# EAGLE board business-card-2 (EAGLE 9.4.2)
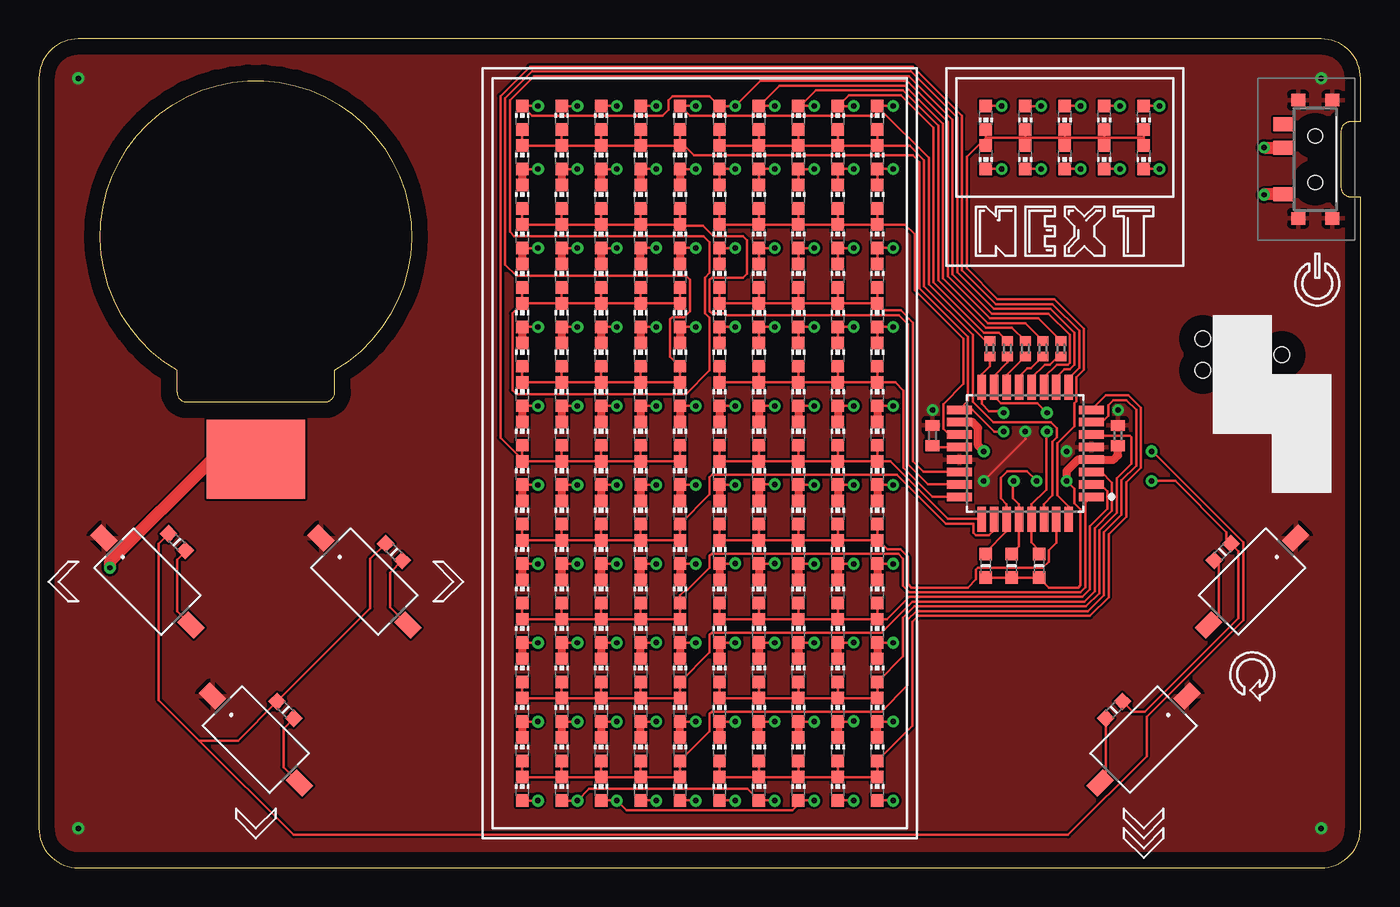
[diagram p0: board, top side]
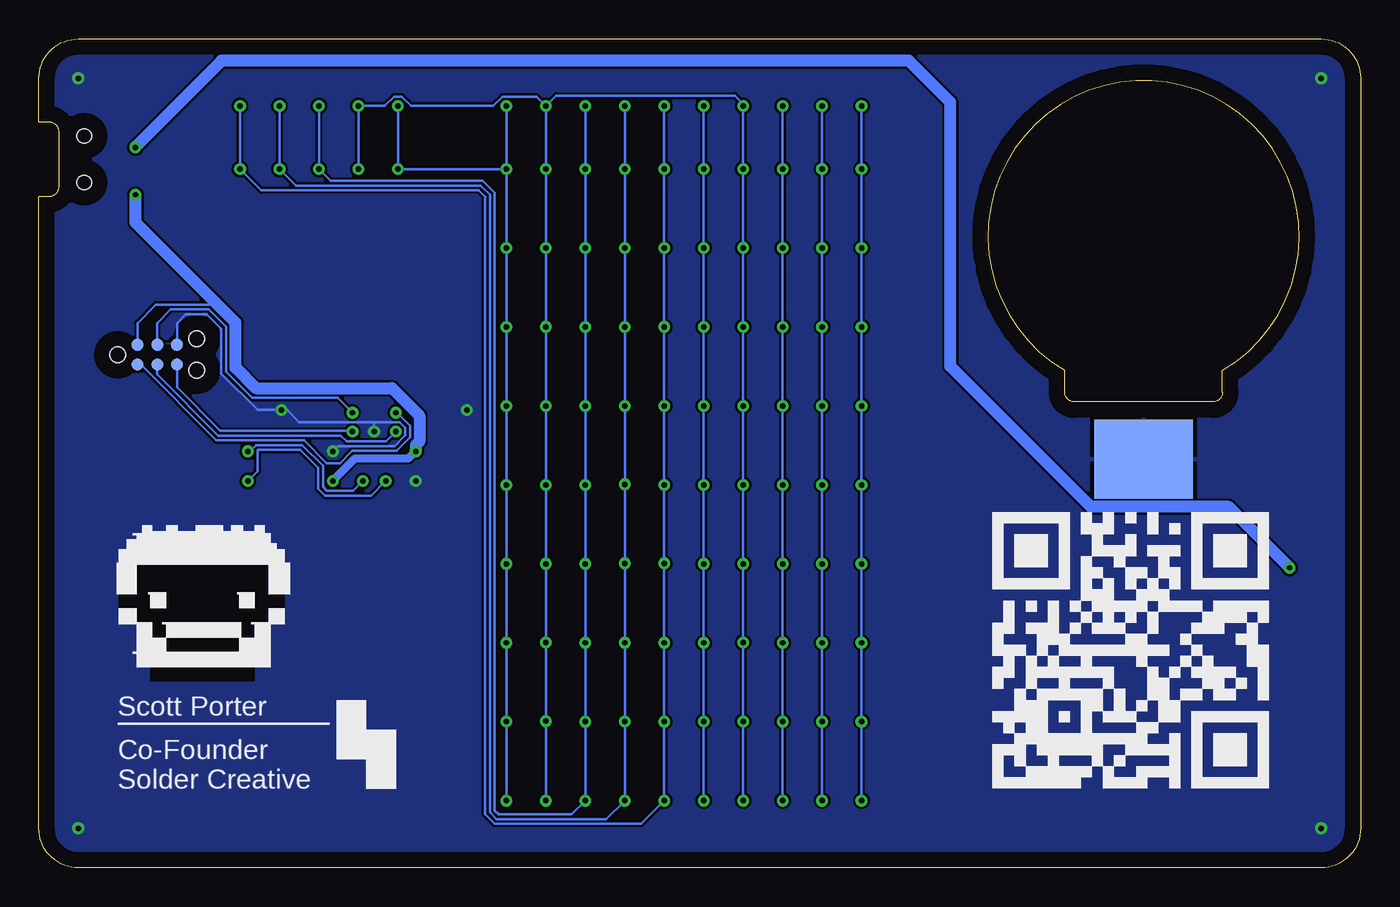
[diagram p1: board, bottom side, seen from below]

Size 85.09 x 53.34 mm. Coordinates in mm from the lower left corner, seen from the top.
Outline: 0,50.8 0,2.54 arc90 2.54,0 82.55,0 arc90 85.09,2.54 85.09,43.18 84.45,43.18 arc-90 83.82,43.81 83.82,47.37 arc-90 84.45,48.01 85.09,48.01 85.09,50.8 arc90 82.55,53.34 2.54,53.34 arc90 0,50.8
Copper layers (1*16): Top 0.035mm / dielectric 1.5mm / Bottom 0.035mm
Design rules "default": minimum track width 6mil, minimum drill 0.35mm, track to track 6mil, track to pad 6mil, pad to pad 6mil, via to via 6mil, smd to smd 6mil, copper to edge 40mil, drill to drill 6mil, minimum pad ring 10mil, minimum via ring 8mil, stop-mask expansion 4mil, vias tented up to drill 0mil, thermal gap 10mil
bRestrict: area 71.2,12 to 77.9,12.1; area 71.2,12.1 to 77.9,12.3; area 71.2,12.3 to 77.9,12.4; area 71.2,12.4 to 77.9,12.5; area 71.2,12.5 to 77.9,12.6; area 71.2,12.6 to 77.9,12.8; area 71.2,12.8 to 77.9,12.9; area 72.2,13.9 to 76.9,14; area 72.2,14 to 76.9,14.2; area 72.2,14.2 to 76.9,14.3; area 72.2,14.3 to 76.9,14.4; area 72.2,14.4 to 76.9,14.5; 63 more areas

## Footprints (pad centres in the part's own frame; a part is rotated, then mirrored left to right if it is on the bottom)
C0402 = smd 0.7 x 0.9: 1 -0.65,0; 2 0.65,0
K21107STA4SW06 = smd 1.5 x 1: 1 -3.95,0; 2 3.95,0
R0402 = smd 0.6 x 0.7: 1 -0.5,0; 2 0.5,0
52101-101-REV-A_RC-MASTER-SMD_R0603MP = smd 0.8 x 0.8: 1 -0.762,0; 2 0.762,0
K31296SE1 = smd 0.9 x 1.25: 1 -2.25,-2.075; 2 -0.75,-2.075; 3 2.25,-2.075 | smd 0.8 x 0.9: MP1 -3.8,1.1; MP2 -3.8,-1.1; MP3 3.8,-1.1; MP4 3.8,1.1 | hole 0.9: -1.5,0; 1.5,0
CHIP-LED0603 = smd 0.8 x 0.8: A 0,-0.75; C 0,0.75
TC2030-IDC-NL = smd 0.787 x 0.787: 1 -1.27,-0.635; 2 -1.27,0.635; 3 0,-0.635; 4 0,0.635; 5 1.27,-0.635; 6 1.27,0.635 | hole 0.991: -2.54,0; 2.54,1.016; 2.54,-1.016
MICROCHIP_ATMEGA328PB-AU_0 = smd 1.6 x 0.55: 1 -4.25,2.8; 2 -4.25,2; 3 -4.25,1.2; 4 -4.25,0.4; 5 -4.25,-0.4; 6 -4.25,-1.2; 7 -4.25,-2; 8 -4.25,-2.8; 17 4.25,-2.8; 18 4.25,-2; 19 4.25,-1.2; 20 4.25,-0.4; 21 4.25,0.4; 22 4.25,1.2; 23 4.25,2; 24 4.25,2.8 | smd 0.55 x 1.6: 9 -2.8,-4.25; 10 -2,-4.25; 11 -1.2,-4.25; 12 -0.4,-4.25; 13 0.4,-4.25; 14 1.2,-4.25; 15 2,-4.25; 16 2.8,-4.25; 25 2.8,4.25; 26 2,4.25; 27 1.2,4.25; 28 0.4,4.25; 29 -0.4,4.25; 30 -1.2,4.25; 31 -2,4.25; 32 -2.8,4.25
THROUGH-HOLE-CR2032 = smd 6.35 x 5.08: P$1 0,-14.351 | smd 6.35 x 5.08 bottom: P$2 0,-14.351

## Placement (x,y rotation side)
C1  10uf  [C0402]  69.47,27.81 270 top
C2  0.1uF  [C0402]  57.53,27.81 90 top
DOWN  K2-1107ST-A4SW-06  [K21107STA4SW06]  13.97,8.26 315 top
FAST_DROP  K2-1107ST-A4SW-06  [K21107STA4SW06]  71.12,8.26 225 top
LEFT  K2-1107ST-A4SW-06  [K21107STA4SW06]  6.99,18.41 315 top
R1  470R  [R0402]  64.64,33.4 270 top
R2  470R  [R0402]  63.5,33.4 270 top
R3  470R  [R0402]  62.36,33.4 270 top
R5  10K  [52101-101-REV-A_RC-MASTER-SMD_R0603MP]  15.88,10.16 135 top
R6  4K7  [52101-101-REV-A_RC-MASTER-SMD_R0603MP]  8.89,20.95 135 top
R7  1K  [52101-101-REV-A_RC-MASTER-SMD_R0603MP]  22.86,20.32 135 top
R8  470R  [R0402]  65.79,33.4 270 top
R9  10K  [52101-101-REV-A_RC-MASTER-SMD_R0603MP]  64.39,19.43 270 top
R10  10K  [52101-101-REV-A_RC-MASTER-SMD_R0603MP]  60.96,19.43 270 top
R11  1K  [52101-101-REV-A_RC-MASTER-SMD_R0603MP]  69.22,10.16 45 top
R12  10K  [52101-101-REV-A_RC-MASTER-SMD_R0603MP]  76.2,20.32 45 top
R14  10K  [52101-101-REV-A_RC-MASTER-SMD_R0603MP]  62.61,19.43 270 top
R15  470R  [R0402]  61.21,33.4 270 top
RIGHT  K2-1107ST-A4SW-06  [K21107STA4SW06]  20.95,18.41 315 top
S1  K3-1296S-E1  [K31296SE1]  82.17,45.59 270 top
S_LED1  20mA  [CHIP-LED0603]  31.11,5.08 0 top
S_LED2  20mA  [CHIP-LED0603]  33.66,5.08 0 top
S_LED3  20mA  [CHIP-LED0603]  36.2,5.08 0 top
S_LED4  20mA  [CHIP-LED0603]  38.73,5.08 0 top
S_LED5  20mA  [CHIP-LED0603]  41.27,5.08 0 top
S_LED6  20mA  [CHIP-LED0603]  31.11,7.62 0 top
S_LED7  20mA  [CHIP-LED0603]  33.66,7.62 0 top
S_LED8  20mA  [CHIP-LED0603]  36.2,7.62 0 top
S_LED9  20mA  [CHIP-LED0603]  38.73,7.62 0 top
S_LED10  20mA  [CHIP-LED0603]  41.27,7.62 0 top
S_LED11  20mA  [CHIP-LED0603]  31.11,10.16 0 top
S_LED12  20mA  [CHIP-LED0603]  33.66,10.16 0 top
S_LED13  20mA  [CHIP-LED0603]  36.2,10.16 0 top
S_LED14  20mA  [CHIP-LED0603]  38.73,10.16 0 top
S_LED15  20mA  [CHIP-LED0603]  41.27,10.16 0 top
S_LED16  20mA  [CHIP-LED0603]  31.11,12.7 0 top
S_LED17  20mA  [CHIP-LED0603]  33.66,12.7 0 top
S_LED18  20mA  [CHIP-LED0603]  36.2,12.7 0 top
S_LED19  20mA  [CHIP-LED0603]  38.73,12.7 0 top
S_LED20  20mA  [CHIP-LED0603]  41.27,12.7 0 top
S_LED21  20mA  [CHIP-LED0603]  31.11,15.24 0 top
S_LED22  20mA  [CHIP-LED0603]  33.66,15.24 0 top
S_LED23  20mA  [CHIP-LED0603]  36.2,15.24 0 top
S_LED24  20mA  [CHIP-LED0603]  38.73,15.24 0 top
S_LED25  20mA  [CHIP-LED0603]  41.27,15.24 0 top
S_LED26  20mA  [CHIP-LED0603]  31.11,17.78 0 top
S_LED27  20mA  [CHIP-LED0603]  33.66,17.78 0 top
S_LED28  20mA  [CHIP-LED0603]  36.2,17.78 0 top
S_LED29  20mA  [CHIP-LED0603]  38.73,17.78 0 top
S_LED30  20mA  [CHIP-LED0603]  41.27,17.78 0 top
S_LED31  20mA  [CHIP-LED0603]  31.11,20.32 0 top
S_LED32  20mA  [CHIP-LED0603]  33.66,20.32 0 top
S_LED33  20mA  [CHIP-LED0603]  36.2,20.32 0 top
S_LED34  20mA  [CHIP-LED0603]  38.73,20.32 0 top
S_LED35  20mA  [CHIP-LED0603]  41.27,20.32 0 top
S_LED36  20mA  [CHIP-LED0603]  31.11,22.86 0 top
S_LED37  20mA  [CHIP-LED0603]  33.66,22.86 0 top
S_LED38  20mA  [CHIP-LED0603]  36.2,22.86 0 top
S_LED39  20mA  [CHIP-LED0603]  38.73,22.86 0 top
S_LED40  20mA  [CHIP-LED0603]  41.27,22.86 0 top
S_LED41  20mA  [CHIP-LED0603]  31.11,25.4 0 top
S_LED42  20mA  [CHIP-LED0603]  33.66,25.4 0 top
S_LED43  20mA  [CHIP-LED0603]  36.2,25.4 0 top
S_LED44  20mA  [CHIP-LED0603]  38.73,25.4 0 top
S_LED45  20mA  [CHIP-LED0603]  41.27,25.4 0 top
S_LED46  20mA  [CHIP-LED0603]  31.11,27.94 0 top
S_LED47  20mA  [CHIP-LED0603]  33.66,27.94 0 top
S_LED48  20mA  [CHIP-LED0603]  36.2,27.94 0 top
S_LED49  20mA  [CHIP-LED0603]  38.73,27.94 0 top
S_LED50  20mA  [CHIP-LED0603]  41.27,27.94 0 top
S_LED51  20mA  [CHIP-LED0603]  31.11,30.48 0 top
S_LED52  20mA  [CHIP-LED0603]  33.66,30.48 0 top
S_LED53  20mA  [CHIP-LED0603]  36.2,30.48 0 top
S_LED54  20mA  [CHIP-LED0603]  38.73,30.48 0 top
S_LED55  20mA  [CHIP-LED0603]  41.27,30.48 0 top
S_LED56  20mA  [CHIP-LED0603]  31.11,33.02 0 top
S_LED57  20mA  [CHIP-LED0603]  33.66,33.02 0 top
S_LED58  20mA  [CHIP-LED0603]  36.2,33.02 0 top
S_LED59  20mA  [CHIP-LED0603]  38.73,33.02 0 top
S_LED60  20mA  [CHIP-LED0603]  41.27,33.02 0 top
S_LED61  20mA  [CHIP-LED0603]  31.11,35.56 0 top
S_LED62  20mA  [CHIP-LED0603]  33.66,35.56 0 top
S_LED63  20mA  [CHIP-LED0603]  36.2,35.56 0 top
S_LED64  20mA  [CHIP-LED0603]  38.73,35.56 0 top
S_LED65  20mA  [CHIP-LED0603]  41.27,35.56 0 top
S_LED66  20mA  [CHIP-LED0603]  31.11,38.1 0 top
S_LED67  20mA  [CHIP-LED0603]  33.66,38.1 0 top
S_LED68  20mA  [CHIP-LED0603]  36.2,38.1 0 top
S_LED69  20mA  [CHIP-LED0603]  38.73,38.1 0 top
S_LED70  20mA  [CHIP-LED0603]  41.27,38.1 0 top
S_LED71  20mA  [CHIP-LED0603]  31.11,40.64 0 top
S_LED72  20mA  [CHIP-LED0603]  33.66,40.64 0 top
S_LED73  20mA  [CHIP-LED0603]  36.2,40.64 0 top
S_LED74  20mA  [CHIP-LED0603]  38.73,40.64 0 top
S_LED75  20mA  [CHIP-LED0603]  41.27,40.64 0 top
S_LED76  20mA  [CHIP-LED0603]  31.11,43.18 0 top
S_LED77  20mA  [CHIP-LED0603]  33.66,43.18 0 top
S_LED78  20mA  [CHIP-LED0603]  36.2,43.18 0 top
S_LED79  20mA  [CHIP-LED0603]  38.73,43.18 0 top
S_LED80  20mA  [CHIP-LED0603]  41.27,43.18 0 top
S_LED81  20mA  [CHIP-LED0603]  31.11,45.72 0 top
S_LED82  20mA  [CHIP-LED0603]  33.66,45.72 0 top
S_LED83  20mA  [CHIP-LED0603]  36.2,45.72 0 top
S_LED84  20mA  [CHIP-LED0603]  38.73,45.72 0 top
S_LED85  20mA  [CHIP-LED0603]  41.27,45.72 0 top
S_LED86  20mA  [CHIP-LED0603]  31.11,48.26 0 top
S_LED87  20mA  [CHIP-LED0603]  33.66,48.26 0 top
S_LED88  20mA  [CHIP-LED0603]  36.2,48.26 0 top
S_LED89  20mA  [CHIP-LED0603]  38.73,48.26 0 top
S_LED90  20mA  [CHIP-LED0603]  41.27,48.26 0 top
S_LED91  20mA  [CHIP-LED0603]  43.81,5.08 0 top
S_LED92  20mA  [CHIP-LED0603]  46.35,5.08 0 top
S_LED93  20mA  [CHIP-LED0603]  48.9,5.08 0 top
S_LED94  20mA  [CHIP-LED0603]  51.44,5.08 0 top
S_LED95  20mA  [CHIP-LED0603]  53.98,5.08 0 top
S_LED96  20mA  [CHIP-LED0603]  43.81,7.62 0 top
S_LED97  20mA  [CHIP-LED0603]  46.35,7.62 0 top
S_LED98  20mA  [CHIP-LED0603]  48.9,7.62 0 top
S_LED99  20mA  [CHIP-LED0603]  51.44,7.62 0 top
S_LED100  20mA  [CHIP-LED0603]  53.98,7.62 0 top
S_LED101  20mA  [CHIP-LED0603]  43.81,10.16 0 top
S_LED102  20mA  [CHIP-LED0603]  46.35,10.16 0 top
S_LED103  20mA  [CHIP-LED0603]  48.9,10.16 0 top
S_LED104  20mA  [CHIP-LED0603]  51.44,10.16 0 top
S_LED105  20mA  [CHIP-LED0603]  53.98,10.16 0 top
S_LED106  20mA  [CHIP-LED0603]  43.81,12.7 0 top
S_LED107  20mA  [CHIP-LED0603]  46.35,12.7 0 top
S_LED108  20mA  [CHIP-LED0603]  48.9,12.7 0 top
S_LED109  20mA  [CHIP-LED0603]  51.44,12.7 0 top
S_LED110  20mA  [CHIP-LED0603]  53.98,12.7 0 top
S_LED111  20mA  [CHIP-LED0603]  43.81,15.24 0 top
S_LED112  20mA  [CHIP-LED0603]  46.35,15.24 0 top
S_LED113  20mA  [CHIP-LED0603]  48.9,15.24 0 top
S_LED114  20mA  [CHIP-LED0603]  51.44,15.24 0 top
S_LED115  20mA  [CHIP-LED0603]  53.98,15.24 0 top
S_LED116  20mA  [CHIP-LED0603]  43.81,17.78 0 top
S_LED117  20mA  [CHIP-LED0603]  46.35,17.78 0 top
S_LED118  20mA  [CHIP-LED0603]  48.9,17.78 0 top
S_LED119  20mA  [CHIP-LED0603]  51.44,17.78 0 top
S_LED120  20mA  [CHIP-LED0603]  53.98,17.78 0 top
S_LED121  20mA  [CHIP-LED0603]  43.81,20.32 0 top
S_LED122  20mA  [CHIP-LED0603]  46.35,20.32 0 top
S_LED123  20mA  [CHIP-LED0603]  48.9,20.32 0 top
S_LED124  20mA  [CHIP-LED0603]  51.44,20.32 0 top
S_LED125  20mA  [CHIP-LED0603]  53.98,20.32 0 top
S_LED126  20mA  [CHIP-LED0603]  43.81,22.86 0 top
S_LED127  20mA  [CHIP-LED0603]  46.35,22.86 0 top
S_LED128  20mA  [CHIP-LED0603]  48.9,22.86 0 top
S_LED129  20mA  [CHIP-LED0603]  51.44,22.86 0 top
S_LED130  20mA  [CHIP-LED0603]  53.98,22.86 0 top
S_LED131  20mA  [CHIP-LED0603]  43.81,25.4 0 top
S_LED132  20mA  [CHIP-LED0603]  46.35,25.4 0 top
S_LED133  20mA  [CHIP-LED0603]  48.9,25.4 0 top
S_LED134  20mA  [CHIP-LED0603]  51.44,25.4 0 top
S_LED135  20mA  [CHIP-LED0603]  53.98,25.4 0 top
S_LED136  20mA  [CHIP-LED0603]  43.81,27.94 0 top
S_LED137  20mA  [CHIP-LED0603]  46.35,27.94 0 top
S_LED138  20mA  [CHIP-LED0603]  48.9,27.94 0 top
S_LED139  20mA  [CHIP-LED0603]  51.44,27.94 0 top
S_LED140  20mA  [CHIP-LED0603]  53.98,27.94 0 top
S_LED141  20mA  [CHIP-LED0603]  43.81,30.48 0 top
S_LED142  20mA  [CHIP-LED0603]  46.35,30.48 0 top
S_LED143  20mA  [CHIP-LED0603]  48.9,30.48 0 top
S_LED144  20mA  [CHIP-LED0603]  51.44,30.48 0 top
S_LED145  20mA  [CHIP-LED0603]  53.98,30.48 0 top
S_LED146  20mA  [CHIP-LED0603]  43.81,33.02 0 top
S_LED147  20mA  [CHIP-LED0603]  46.35,33.02 0 top
S_LED148  20mA  [CHIP-LED0603]  48.9,33.02 0 top
S_LED149  20mA  [CHIP-LED0603]  51.44,33.02 0 top
S_LED150  20mA  [CHIP-LED0603]  53.98,33.02 0 top
S_LED151  20mA  [CHIP-LED0603]  43.81,35.56 0 top
S_LED152  20mA  [CHIP-LED0603]  46.35,35.56 0 top
S_LED153  20mA  [CHIP-LED0603]  48.9,35.56 0 top
S_LED154  20mA  [CHIP-LED0603]  51.44,35.56 0 top
S_LED155  20mA  [CHIP-LED0603]  53.98,35.56 0 top
S_LED156  20mA  [CHIP-LED0603]  43.81,38.1 0 top
S_LED157  20mA  [CHIP-LED0603]  46.35,38.1 0 top
S_LED158  20mA  [CHIP-LED0603]  48.9,38.1 0 top
S_LED159  20mA  [CHIP-LED0603]  51.44,38.1 0 top
S_LED160  20mA  [CHIP-LED0603]  53.98,38.1 0 top
S_LED161  20mA  [CHIP-LED0603]  43.81,40.64 0 top
S_LED162  20mA  [CHIP-LED0603]  46.35,40.64 0 top
S_LED163  20mA  [CHIP-LED0603]  48.9,40.64 0 top
S_LED164  20mA  [CHIP-LED0603]  51.44,40.64 0 top
S_LED165  20mA  [CHIP-LED0603]  53.98,40.64 0 top
S_LED166  20mA  [CHIP-LED0603]  43.81,43.18 0 top
S_LED167  20mA  [CHIP-LED0603]  46.35,43.18 0 top
S_LED168  20mA  [CHIP-LED0603]  48.9,43.18 0 top
S_LED169  20mA  [CHIP-LED0603]  51.44,43.18 0 top
S_LED170  20mA  [CHIP-LED0603]  53.98,43.18 0 top
S_LED171  20mA  [CHIP-LED0603]  43.81,45.72 0 top
S_LED172  20mA  [CHIP-LED0603]  46.35,45.72 0 top
S_LED173  20mA  [CHIP-LED0603]  48.9,45.72 0 top
S_LED174  20mA  [CHIP-LED0603]  51.44,45.72 0 top
S_LED175  20mA  [CHIP-LED0603]  53.98,45.72 0 top
S_LED176  20mA  [CHIP-LED0603]  43.81,48.26 0 top
S_LED177  20mA  [CHIP-LED0603]  46.35,48.26 0 top
S_LED178  20mA  [CHIP-LED0603]  48.9,48.26 0 top
S_LED179  20mA  [CHIP-LED0603]  51.44,48.26 0 top
S_LED180  20mA  [CHIP-LED0603]  53.98,48.26 0 top
S_LED181  20mA  [CHIP-LED0603]  71.12,48.26 180 top
S_LED182  20mA  [CHIP-LED0603]  68.58,48.26 180 top
S_LED183  20mA  [CHIP-LED0603]  66.04,48.26 180 top
S_LED184  20mA  [CHIP-LED0603]  63.5,48.26 180 top
S_LED185  20mA  [CHIP-LED0603]  60.96,48.26 180 top
S_LED186  20mA  [CHIP-LED0603]  71.12,45.72 180 top
S_LED187  20mA  [CHIP-LED0603]  68.58,45.72 180 top
S_LED188  20mA  [CHIP-LED0603]  66.04,45.72 180 top
S_LED189  20mA  [CHIP-LED0603]  63.5,45.72 180 top
S_LED190  20mA  [CHIP-LED0603]  60.96,45.72 180 top
SPIN  K2-1107ST-A4SW-06  [K21107STA4SW06]  78.11,18.41 225 top
TC1  TC2030-IDC-NL  [TC2030-IDC-NL]  77.47,33.02 0 bottom
U1  MICROCHIP_ATMEGA328PB-AUMICROCHIP_ATMEGA328PB-AU_0_0  [MICROCHIP_ATMEGA328PB-AU_0]  63.5,26.67 180 top
U$1  THROUGHHOLE-CR2032  [THROUGH-HOLE-CR2032]  13.97,40.64 0 top

## Library data of the parts
C1 C2 = rcl; SPICEPREFIX: C
DOWN FAST_DROP LEFT RIGHT SPIN = K2-1107ST-A4SW-06; DESCRIPTION: Tactile Switches SPST-NO 6.10mm x 3.60mm 2.50mm 50mA @ 12VDC SMD RoHS; HEIGHT: 2.5mm; MANUFACTURER_NAME: Korean Hroparts Elec; MANUFACTURER_PART_NUMBER: K2-1107ST-A4SW-06
R1-R3 R8 R15 = rcl; SPICEPREFIX: R
R5-R7 R9-R12 R14 = ESP32_DMX_Audio
S1 = K3-1296S-E1; DESCRIPTION: Toggle Switches SMD RoHS; HEIGHT: 1.6mm; MANUFACTURER_NAME: Korean Hroparts Elec; MANUFACTURER_PART_NUMBER: K3-1296S-E1
S_LED1-S_LED190 = led
TC1 = TC2030-IDC; AVAILABILITY: Warning; DESCRIPTION: Plug-Of-Nails™ Adapter Cable; MF: Tag-Connect LLC; MP: TC2030-IDC; PACKAGE: None; PRICE: None; PURCHASE-URL: https://pricing.snapeda.com/search/part/TC2030-IDC/?ref=eda
U1 = Microchip - ATmega328PB-AU; CENTROID_NOT_SPECIFIED: No; DATASHEET: http://ww1.microchip.com/downloads/en/DeviceDoc/40001907A.pdf; DIGIKEY_DESCRIPTION: IC MCU 8BIT 32KB FLASH 32TQFP; DIGIKEY_PART_NUMBER: ATMEGA328PB-AU-ND; LEAD_FREE: yes; MF: Microchip; MFG_PACKAGE_IDENT: 32A; MOUSER_PART_NUMBER: 556-ATMEGA328PB-AU; MPN: ATmega328PB-AU; PACKAGE: TQFP32; PREFIX: U; ROHS: yes; TEMPERATURE_RANGE_HIGH: +85°C; TEMPERATURE_RANGE_LOW: -40°C; VOLTAGE: 5.5V
U$1 = through-hole-cr2032

## Nets
AREF: C2.1 U1.20
BUT_DIR: R5.2 R6.2 R7.2 R10.1 U1.27
BUT_DOWN: DOWN.2 R5.1
BUT_LEFT: LEFT.2 R6.1
BUT_RIGHT: R7.1 RIGHT.2
BUT_SPIN: R11.2 R12.2 R14.1 U1.28
BUT_SPIN_LEFT: FAST_DROP.2 R11.1
BUT_SPIN_RIGHT: R12.1 SPIN.2
C0: S_LED1.C S_LED2.C S_LED3.C S_LED4.C S_LED5.C S_LED6.A S_LED7.A S_LED8.A S_LED9.A S_LED10.A U1.7
C1: S_LED11.C S_LED12.C S_LED13.C S_LED14.C S_LED15.C S_LED16.A S_LED17.A S_LED18.A S_LED19.A S_LED20.A U1.3
C2: S_LED21.C S_LED22.C S_LED23.C S_LED24.C S_LED25.C S_LED26.A S_LED27.A S_LED28.A S_LED29.A S_LED30.A U1.1
C3: S_LED31.C S_LED32.C S_LED33.C S_LED34.C S_LED35.C S_LED36.A S_LED37.A S_LED38.A S_LED39.A S_LED40.A U1.26
C4: S_LED41.C S_LED42.C S_LED43.C S_LED44.C S_LED45.C S_LED46.A S_LED47.A S_LED48.A S_LED49.A S_LED50.A U1.9
C5: S_LED51.C S_LED52.C S_LED53.C S_LED54.C S_LED55.C S_LED56.A S_LED57.A S_LED58.A S_LED59.A S_LED60.A U1.10
C6: S_LED61.C S_LED62.C S_LED63.C S_LED64.C S_LED65.C S_LED66.A S_LED67.A S_LED68.A S_LED69.A S_LED70.A U1.11
C7: S_LED71.C S_LED72.C S_LED73.C S_LED74.C S_LED75.C S_LED76.A S_LED77.A S_LED78.A S_LED79.A S_LED80.A U1.23
C8: S_LED81.C S_LED82.C S_LED83.C S_LED84.C S_LED85.C S_LED86.A S_LED87.A S_LED88.A S_LED89.A S_LED90.A TC1.3 U1.17
C9: S_LED91.C S_LED92.C S_LED93.C S_LED94.C S_LED95.C S_LED96.A S_LED97.A S_LED98.A S_LED99.A S_LED100.A U1.8
C10: S_LED101.C S_LED102.C S_LED103.C S_LED104.C S_LED105.C S_LED106.A S_LED107.A S_LED108.A S_LED109.A S_LED110.A U1.6
C11: S_LED111.C S_LED112.C S_LED113.C S_LED114.C S_LED115.C S_LED116.A S_LED117.A S_LED118.A S_LED119.A S_LED120.A U1.2
C12: S_LED121.C S_LED122.C S_LED123.C S_LED124.C S_LED125.C S_LED126.A S_LED127.A S_LED128.A S_LED129.A S_LED130.A U1.31
C13: S_LED131.C S_LED132.C S_LED133.C S_LED134.C S_LED135.C S_LED136.A S_LED137.A S_LED138.A S_LED139.A S_LED140.A U1.25
C14: S_LED141.C S_LED142.C S_LED143.C S_LED144.C S_LED145.C S_LED146.A S_LED147.A S_LED148.A S_LED149.A S_LED150.A U1.24
C15: S_LED151.C S_LED152.C S_LED153.C S_LED154.C S_LED155.C S_LED156.A S_LED157.A S_LED158.A S_LED159.A S_LED160.A U1.22
C16: S_LED161.C S_LED162.C S_LED163.C S_LED164.C S_LED165.C S_LED166.A S_LED167.A S_LED168.A S_LED169.A S_LED170.A U1.19
C17: S_LED171.C S_LED172.C S_LED173.C S_LED174.C S_LED175.C S_LED176.A S_LED177.A S_LED178.A S_LED179.A S_LED180.A U1.30
C18: S_LED181.C S_LED182.C S_LED183.C S_LED184.C S_LED185.C S_LED186.A S_LED187.A S_LED188.A S_LED189.A S_LED190.A U1.32
GND: C1.1 C2.2 DOWN.1 FAST_DROP.1 LEFT.1 RIGHT.1 S1.MP1 S1.MP2 S1.MP3 S1.MP4 SPIN.1 TC1.6 U1.5 U1.21 U$1.P$2
MISO: R15.2 TC1.1 U1.16
MOSI: R3.2 TC1.4 U1.15
N$2: R2.2 U1.14
N$21: R8.2 U1.12
N$22: R1.2 U1.13
R0: R8.1 S_LED1.A S_LED6.C S_LED11.A S_LED16.C S_LED21.A S_LED26.C S_LED31.A S_LED36.C S_LED41.A S_LED46.C S_LED51.A S_LED56.C S_LED61.A S_LED66.C S_LED71.A S_LED76.C S_LED81.A S_LED86.C S_LED91.A S_LED96.C S_LED101.A S_LED106.C S_LED111.A S_LED116.C S_LED121.A S_LED126.C S_LED131.A S_LED136.C S_LED141.A S_LED146.C S_LED151.A S_LED156.C S_LED161.A S_LED166.C S_LED171.A S_LED176.C S_LED181.A S_LED186.C
R1: R1.1 S_LED2.A S_LED7.C S_LED12.A S_LED17.C S_LED22.A S_LED27.C S_LED32.A S_LED37.C S_LED42.A S_LED47.C S_LED52.A S_LED57.C S_LED62.A S_LED67.C S_LED72.A S_LED77.C S_LED82.A S_LED87.C S_LED92.A S_LED97.C S_LED102.A S_LED107.C S_LED112.A S_LED117.C S_LED122.A S_LED127.C S_LED132.A S_LED137.C S_LED142.A S_LED147.C S_LED152.A S_LED157.C S_LED162.A S_LED167.C S_LED172.A S_LED177.C S_LED182.A S_LED187.C
R2: R2.1 S_LED3.A S_LED8.C S_LED13.A S_LED18.C S_LED23.A S_LED28.C S_LED33.A S_LED38.C S_LED43.A S_LED48.C S_LED53.A S_LED58.C S_LED63.A S_LED68.C S_LED73.A S_LED78.C S_LED83.A S_LED88.C S_LED93.A S_LED98.C S_LED103.A S_LED108.C S_LED113.A S_LED118.C S_LED123.A S_LED128.C S_LED133.A S_LED138.C S_LED143.A S_LED148.C S_LED153.A S_LED158.C S_LED163.A S_LED168.C S_LED173.A S_LED178.C S_LED183.A S_LED188.C
R3: R3.1 S_LED4.A S_LED9.C S_LED14.A S_LED19.C S_LED24.A S_LED29.C S_LED34.A S_LED39.C S_LED44.A S_LED49.C S_LED54.A S_LED59.C S_LED64.A S_LED69.C S_LED74.A S_LED79.C S_LED84.A S_LED89.C S_LED94.A S_LED99.C S_LED104.A S_LED109.C S_LED114.A S_LED119.C S_LED124.A S_LED129.C S_LED134.A S_LED139.C S_LED144.A S_LED149.C S_LED154.A S_LED159.C S_LED164.A S_LED169.C S_LED174.A S_LED179.C S_LED184.A S_LED189.C
R4: R15.1 S_LED5.A S_LED10.C S_LED15.A S_LED20.C S_LED25.A S_LED30.C S_LED35.A S_LED40.C S_LED45.A S_LED50.C S_LED55.A S_LED60.C S_LED65.A S_LED70.C S_LED75.A S_LED80.C S_LED85.A S_LED90.C S_LED95.A S_LED100.C S_LED105.A S_LED110.C S_LED115.A S_LED120.C S_LED125.A S_LED130.C S_LED135.A S_LED140.C S_LED145.A S_LED150.C S_LED155.A S_LED160.C S_LED165.A S_LED170.C S_LED175.A S_LED180.C S_LED185.A S_LED190.C
RESET: R9.1 TC1.5 U1.29
VCC: S1.2 U$1.P$1
VCC_IN: C1.2 R9.2 R10.2 R14.2 S1.3 TC1.2 U1.4 U1.18

## Tracks (layer width: path | path; a pad name or v marks a point on that pad's centre or on a via)
AREF
  Top 0.152: C2.1 57.62,27.07 U1.20
BUT_DIR  (via drill 0.35)
  Top 0.152: R10.1 60.96,20.32 62.3,21.66 U1.27 62.3,23.4 61.93,23.77 61.93,25.1 62.36,25.53 63.6,25.53 v64.24,24.89 | 10.34,8.18 16.41,2.11 66.24,2.11 71.31,7.18 71.31,9.72 77.53,15.94 77.53,20.95 71.69,26.8 v71.63,26.8 | 10.34,8.18 7.72,10.79 7.72,20.86 R6.2 | 10.34,8.18 12.81,8.18 R5.2 21.34,16.7 21.34,19.87 R7.2
  Bottom 0.152: v71.63,26.8 71.5,26.8 71.09,27.2 68.15,27.2 66.8,25.86 66.8,24.51 66.55,24.26 64.87,24.26 v64.24,24.89
BUT_DOWN
  Top 0.152: R5.1 15.75,8.96 15.75,6.48 DOWN.2
BUT_LEFT
  Top 0.152: R6.1 9.43,20.35 8.89,19.81 8.89,16.51 LEFT.2
BUT_RIGHT
  Top 0.152: R7.1 22.61,18.99 22.61,16.76 RIGHT.2
BUT_SPIN  (via drill 0.35)
  Top 0.152: R14.1 63.1,20.68 U1.28 63.1,23.39 62.69,23.79 62.69,24.82 v62.76,24.89 | R11.2 70.42,10.03 71.2,10.03 77.23,16.06 77.23,20.37 R12.2 76.45,21.14 76.45,21.6 73.16,24.89 v71.63,24.89
  Bottom 0.152: v71.63,24.89 70.99,25.53 70.99,26.87 70.97,26.9 68.27,26.9 67.11,25.73 67.11,24.39 66.67,23.95 63.7,23.95 v62.76,24.89
BUT_SPIN_LEFT
  Top 0.152: R11.1 68.68,5.81 FAST_DROP.2 | FAST_DROP.2
BUT_SPIN_RIGHT
  Top 0.152: SPIN.2 75.95,16.26 75.95,19.5 R12.1
C0
  Top 0.152: S_LED2.C S_LED1.C S_LED6.A | S_LED2.C S_LED3.C | S_LED3.C S_LED4.C | S_LED4.C S_LED5.C S_LED10.A 43.19,8.78 43.19,9.9 43.32,10.04 54.23,10.04 55.92,11.74 55.92,15.95 56.48,16.51 67.54,16.51 68.57,17.54 68.57,21.59 69.69,22.71 69.69,24.94 70.63,25.88 70.63,29.48 70.02,30.1 69.19,30.1 68.83,29.75 68.83,29.08 68.42,28.67 U1.7 | S_LED2.C S_LED7.A | S_LED3.C S_LED8.A | S_LED4.C S_LED9.A
C1
  Top 0.152: S_LED12.C S_LED11.C S_LED16.A | S_LED12.C S_LED13.C | S_LED13.C S_LED14.C | S_LED14.C S_LED15.C S_LED20.A 43.19,13.86 43.19,14.98 43.32,15.12 54.23,15.12 56.23,17.12 67.29,17.12 67.96,17.8 67.96,21.84 69.08,22.96 69.08,24.77 68.38,25.47 U1.3 | S_LED12.C S_LED17.A | S_LED13.C S_LED18.A | S_LED14.C S_LED19.A
C2
  Top 0.152: S_LED22.C S_LED21.C S_LED26.A | S_LED22.C S_LED23.C | S_LED23.C S_LED24.C | S_LED24.C S_LED25.C | S_LED22.C S_LED27.A | S_LED23.C S_LED28.A | S_LED24.C S_LED29.A | S_LED25.C S_LED30.A | S_LED25.C 41.27,17.53 41.65,17.9 41.77,17.9 43.19,19.32 43.19,20.07 43.32,20.2 55.32,20.2 55.63,19.89 55.63,18.14 56.03,17.73 67.04,17.73 67.35,18.05 67.35,23.47 U1.1
C3
  Top 0.152: S_LED32.C S_LED31.C S_LED36.A | S_LED32.C S_LED33.C | S_LED33.C S_LED34.C | S_LED34.C S_LED35.C S_LED40.A 43.19,24.02 43.19,25.14 43.32,25.28 55.25,25.28 58.39,22.14 60.16,22.14 60.16,21.57 60.33,21.39 61.17,21.39 61.5,21.72 U1.26 | S_LED32.C S_LED37.A | S_LED33.C S_LED38.A | S_LED34.C S_LED39.A
C4
  Top 0.152: S_LED42.C S_LED41.C 31.11,26.29 | S_LED42.C S_LED43.C | S_LED43.C S_LED44.C | S_LED44.C S_LED45.C S_LED50.A | S_LED44.C S_LED49.A | S_LED43.C S_LED48.A | S_LED42.C S_LED47.A | 31.11,26.29 S_LED46.A | 31.11,26.29 29.72,27.69 29.72,49.66 31.61,51.55 56.26,51.55 59.43,48.38 59.43,38.44 61.59,36.27 65.25,36.27 66.97,34.55 66.97,32.18 66.3,31.5 U1.9
C5
  Top 0.152: S_LED52.C S_LED51.C S_LED56.A | S_LED52.C S_LED53.C | S_LED53.C S_LED54.C | S_LED54.C S_LED55.C S_LED60.A 40.65,32.9 40.65,35.3 40.78,35.44 41.53,35.44 41.9,35.81 41.9,37.84 41.65,38.1 30.74,38.1 30.02,38.82 30.02,49.53 31.74,51.25 56.13,51.25 59.12,48.25 59.12,38.31 61.47,35.97 65.12,35.97 66.67,34.42 66.67,32.38 66.36,32.07 66.01,32.07 65.5,31.55 U1.10 | S_LED54.C S_LED59.A | S_LED53.C S_LED58.A | S_LED52.C S_LED57.A
C6
  Top 0.152: S_LED61.C S_LED62.C | S_LED62.C S_LED63.C | S_LED63.C S_LED64.C | S_LED64.C S_LED65.C S_LED70.A | S_LED61.C S_LED66.A | S_LED62.C S_LED67.A | S_LED63.C S_LED68.A | S_LED64.C S_LED69.A | S_LED61.C 30.49,35.68 30.49,30.73 30.74,30.48 41.65,30.48 43.19,32.02 43.19,35.38 42.88,35.69 42.88,37.97 43.19,38.28 43.19,40.25 42.8,40.64 30.61,40.64 30.33,40.92 30.33,49.4 31.87,50.94 56.01,50.94 58.82,48.13 58.82,38.18 61.34,35.66 65,35.66 66.36,34.3 66.36,32.51 66.23,32.37 65.52,32.37 64.7,31.55 U1.11
C7
  Top 0.152: S_LED72.C S_LED71.C S_LED76.A | S_LED72.C S_LED73.C | S_LED73.C S_LED74.C | S_LED74.C S_LED75.C | S_LED75.C S_LED80.A | S_LED74.C S_LED79.A | S_LED73.C S_LED78.A | S_LED72.C S_LED77.A | S_LED75.C 41.34,41.33 42.76,41.33 43.44,40.65 45.33,40.65 45.59,40.38 45.59,38.23 45.34,37.98 43.32,37.98 43.19,37.84 43.19,35.81 43.32,35.68 44.08,35.68 44.2,35.56 55.35,35.56 55.96,34.96 55.96,25.96 57.24,24.67 U1.23
C8  (via drill 0.35)
  Top 0.152: S_LED82.C S_LED81.C S_LED86.A | S_LED82.C S_LED83.C | S_LED83.C S_LED84.C | S_LED84.C S_LED85.C | S_LED85.C S_LED90.A | S_LED84.C S_LED89.A | S_LED83.C S_LED88.A | S_LED82.C S_LED87.A | S_LED85.C 41.55,46.47 42.18,45.84 56.26,45.84 56.69,45.41 56.69,37.3 59.82,34.16 59.82,30.04 U1.17 60.1,29.47 61.51,28.07 v62.1,28.07
  Bottom 0.152: TC1.3 77.47,31.75 73.53,27.81 65.66,27.81 65.28,27.43 62.74,27.43 v62.1,28.07
C9
  Top 0.152: S_LED92.C S_LED91.C S_LED96.A | S_LED92.C S_LED93.C | S_LED93.C S_LED94.C | S_LED94.C S_LED95.C S_LED100.A 56.23,9.12 56.23,15.83 56.61,16.2 67.67,16.2 68.88,17.42 68.88,21.47 70,22.59 70,24.81 70.94,25.75 70.94,29.61 70.14,30.4 68.68,30.4 U1.8 | S_LED92.C S_LED97.A | S_LED93.C S_LED98.A | S_LED94.C S_LED99.A
C10
  Top 0.152: S_LED102.C S_LED101.C S_LED106.A | S_LED102.C S_LED103.C | S_LED103.C S_LED104.C | S_LED104.C S_LED105.C S_LED110.A 55.62,13.6 55.62,16.08 56.35,16.82 67.41,16.82 68.27,17.67 68.27,21.72 69.39,22.84 69.39,25.07 70.33,26.01 70.33,27.71 70.23,27.81 67.81,27.81 U1.6 | S_LED102.C S_LED107.A | S_LED103.C S_LED108.A | S_LED104.C S_LED109.A
C11
  Top 0.152: S_LED112.C S_LED111.C S_LED116.A | S_LED112.C S_LED113.C | S_LED113.C S_LED114.C | S_LED114.C S_LED115.C | S_LED112.C S_LED117.A | S_LED113.C S_LED118.A | S_LED114.C S_LED119.A | S_LED115.C S_LED120.A | S_LED115.C 54.61,15.99 56.04,17.42 67.16,17.42 67.66,17.92 67.66,21.97 68.78,23.09 68.78,24.24 68.35,24.67 U1.2
C12
  Top 0.152: S_LED122.C S_LED121.C S_LED126.A | S_LED122.C S_LED123.C | S_LED123.C S_LED124.C | S_LED124.C S_LED125.C | S_LED122.C S_LED127.A | S_LED123.C S_LED128.A | S_LED124.C S_LED129.A | S_LED125.C S_LED130.A | U1.31 65.5,20.92 65.02,20.44 65.02,19.7 64.62,19.3 60.47,19.3 60.33,19.16 60.33,18.57 59.79,18.03 56.16,18.03 55.93,18.26 55.93,20.02 55.45,20.5 54.63,20.5 54.06,21.07 S_LED125.C
C13
  Top 0.152: S_LED132.C S_LED131.C S_LED136.A | S_LED132.C S_LED133.C | S_LED133.C S_LED134.C | S_LED134.C S_LED135.C | S_LED135.C S_LED140.A | S_LED134.C S_LED139.A | S_LED133.C S_LED138.A | S_LED132.C S_LED137.A | S_LED135.C 54.81,26.15 58.51,22.45 60.67,22.45 U1.25
C14
  Top 0.152: S_LED142.C S_LED141.C S_LED146.A | S_LED142.C S_LED143.C | S_LED143.C S_LED144.C | S_LED144.C S_LED145.C | S_LED145.C S_LED150.A | S_LED144.C S_LED149.A | S_LED143.C S_LED148.A | S_LED142.C S_LED147.A | S_LED145.C 55.13,31.23 55.65,30.71 55.65,25.76 57.54,23.87 U1.24
C15
  Top 0.152: S_LED152.C S_LED151.C S_LED156.A | S_LED152.C S_LED153.C | S_LED153.C S_LED154.C | S_LED154.C S_LED155.C | S_LED152.C S_LED157.A | S_LED153.C S_LED158.A | S_LED154.C S_LED159.A | S_LED155.C S_LED160.A | U1.22 56.95,25.47 56.26,26.16 56.26,35.09 55.48,35.87 54.42,35.87 S_LED155.C
C16
  Top 0.152: S_LED162.C S_LED161.C S_LED166.A | S_LED162.C S_LED163.C | S_LED163.C S_LED164.C | S_LED164.C S_LED165.C | S_LED162.C S_LED167.A | S_LED163.C S_LED168.A | S_LED164.C S_LED169.A | S_LED165.C S_LED170.A | U1.19 58.62,27.87 58.22,28.27 58.22,29.84 59.52,31.14 59.52,34.04 56.38,37.17 56.38,40.77 55.77,41.39 S_LED165.C
C17
  Top 0.152: S_LED172.C S_LED171.C S_LED176.A | S_LED172.C S_LED173.C | S_LED173.C S_LED174.C | S_LED174.C S_LED175.C | S_LED175.C S_LED180.A | S_LED174.C S_LED179.A | S_LED173.C S_LED178.A | S_LED172.C S_LED177.A | S_LED175.C 56.06,46.47 56.99,45.54 56.99,37.43 60.13,34.29 60.13,29.99 61.44,28.67 65.15,28.67 65.53,28.29 65.53,27.7 65.25,27.43 65.25,23.95 64.7,23.4 U1.30
C18
  Top 0.152: S_LED187.A 68.58,46.99 | S_LED182.C 68.58,46.99 | S_LED189.A 63.5,46.99 | S_LED184.C 63.5,46.99 | S_LED185.C 60.96,46.99 | S_LED190.A 60.96,46.99 | U1.32 66.3,23.23 65.56,23.98 65.56,27.3 66.67,28.42 66.67,29.9 66.8,30.02 66.8,31.57 67.28,32.05 67.28,34.67 65.38,36.58 61.72,36.58 59.73,38.56 59.73,45.76 60.96,46.99 | S_LED183.C 66.04,46.99 | S_LED188.A 66.04,46.99 | 60.96,46.99 63.5,46.99 | 63.5,46.99 66.04,46.99 | 66.04,46.99 68.58,46.99 | S_LED181.C 71.12,46.99 | 71.12,46.99 S_LED186.A | 68.58,46.99 71.12,46.99
GND  (via drill 0.35)
  Top 0.152: v60.83,24.89 63.5,27.56 v63.5,28.07
  Bottom 0.152: 63.5,28.67 61.85,28.67 61.5,28.32 61.5,27.82 62.19,27.13 65.84,27.13 v66.17,26.8 | 63.5,28.67 68.32,28.67 69.11,29.46 v69.47,29.46 71.02,29.46 73.34,31.79 73.34,34.69 74.27,35.62 75.63,35.62 76.2,35.05 TC1.6 | v63.5,28.07 63.5,28.67
  other vias: 57.53,29.46 82.55,50.8 2.54,50.8 2.54,2.54 82.55,2.54
  pour Top: -2.54,55.88 88.9,55.88 88.9,-2.54 -2.54,-2.54
  pour Bottom: -2.54,55.88 88.9,55.88 88.9,-2.54 -2.54,-2.54
MISO  (via drill 0.35)
  Top 0.152: R15.2 61.21,32.27 60.7,31.75 U1.16 60.7,29.86 61.17,29.39 62,29.39 v62.1,29.28
  Bottom 0.152: v62.1,29.28 62.03,29.28 61.19,28.45 61.19,27.69 62.06,26.82 64.92,26.82 65.71,26.04 66.55,26.04 68.02,27.51 73.66,27.51 78.54,32.38 TC1.1
MOSI  (via drill 0.35)
  Top 0.152: R3.2 62.36,32.52 61.5,31.66 U1.15 61.5,30.32 61.93,29.89 64.29,29.89 v64.9,29.28
  Bottom 0.152: v64.9,29.28 65.86,30.25 71.37,30.25 73.04,31.91 73.04,34.82 74.15,35.93 76.59,35.93 77.47,35.05 TC1.4
N$2
  Top 0.152: U1.14 62.3,31.7 R2.2
N$21
  Top 0.152: U1.12 63.9,31.52 64.75,32.37 65.09,32.37 65.6,32.89 65.6,32.9 R8.2
N$22
  Top 0.152: R1.2 63.87,32.13 63.63,32.13 63.1,31.6 U1.13
R0  (via drill 0.35)
  Top 0.152: v32.13,49.02 31.13,49.02 S_LED86.C 31.74,48.38 40.13,48.38 40.52,48.77 40.52,49.38 40.78,49.64 43.19,49.64 S_LED176.C v44.82,49.01 v44.83,49.02 46.45,50.64 55.88,50.64 58.52,48 58.52,38.06 61.22,35.36 64.33,35.36 R8.1 | S_LED166.C S_LED171.A v44.82,44.97 v44.83,44.96 | S_LED156.C S_LED161.A 43.83,39.88 v44.83,39.88 | S_LED146.C S_LED151.A v44.83,34.81 | S_LED81.A 31.13,44.96 v32.13,44.96 | S_LED71.A 31.13,39.88 v32.13,39.88 | S_LED61.A 31.13,34.8 v32.13,34.8 | S_LED51.A 32.12,29.73 v32.13,29.72 | S_LED41.A 31.13,24.64 v32.13,24.64 | S_LED31.A 31.13,19.56 v32.13,19.56 | S_LED21.A 31.13,14.48 v32.13,14.48 | S_LED11.A 31.13,9.4 v32.13,9.4 | S_LED1.A 31.13,4.32 v32.13,4.32 | S_LED141.A v44.82,29.73 v44.83,29.72 | S_LED131.A v44.82,24.65 v44.83,24.64 | S_LED121.A 44.81,19.57 v44.83,19.59 | S_LED111.A 43.83,14.48 v44.83,14.48 | S_LED101.A v44.82,9.41 v44.83,9.4 | S_LED91.A v44.82,4.33 v44.83,4.32 | S_LED181.A 71.13,49.02 v72.14,49.02 | S_LED186.C 72.12,44.97 v72.14,44.96
  Top 0.508: S_LED81.A S_LED76.C | S_LED71.A S_LED66.C | S_LED61.A S_LED56.C | S_LED51.A S_LED46.C | S_LED141.A S_LED136.C | S_LED131.A S_LED126.C | S_LED41.A S_LED36.C | S_LED31.A S_LED26.C | S_LED121.A S_LED116.C | S_LED111.A S_LED106.C | S_LED21.A S_LED16.C | S_LED11.A S_LED6.C | S_LED101.A S_LED96.C
  Bottom 0.152: v32.13,4.32 v32.13,9.4 v32.13,14.48 v32.13,19.56 v32.13,24.64 v32.13,29.72 v32.13,34.8 v32.13,39.88 v32.13,44.96 v32.13,49.02 | v44.83,49.02 v44.83,44.96 v44.83,39.88 v44.83,34.81 v44.83,29.72 v44.83,24.64 v44.83,19.59 v44.83,14.48 v44.83,9.4 v44.83,4.32 46.33,2.82 55.75,2.82 56.36,3.43 56.36,43.18 56.77,43.59 70.76,43.59 v72.14,44.96 v72.14,49.02
R1  (via drill 0.35)
  Top 0.152: S_LED87.C 34.66,49.01 v34.67,49.02 | S_LED167.C S_LED172.A v47.36,44.97 v47.37,44.96 | S_LED157.C S_LED162.A 46.37,39.88 v47.37,39.88 | S_LED147.C S_LED152.A 46.37,34.8 v47.37,34.8 | S_LED82.A 33.67,44.96 v34.67,44.96 | S_LED72.A 33.67,39.88 v34.67,39.88 | S_LED62.A 33.67,34.8 v34.67,34.8 | S_LED52.A 33.67,29.72 v34.67,29.72 | S_LED42.A 33.67,24.64 v34.67,24.64 | S_LED32.A 33.67,19.56 v34.67,19.56 | S_LED22.A 33.67,14.48 v34.67,14.48 | S_LED12.A 33.67,9.4 v34.67,9.4 | S_LED2.A 33.67,4.32 v34.67,4.32 35.43,5.08 45.6,5.08 S_LED92.A v47.36,4.33 v47.37,4.32 | S_LED142.A v47.36,29.73 v47.37,29.72 | S_LED132.A 46.38,24.67 v47.37,24.67 | S_LED122.A 47.35,19.57 v47.37,19.59 | S_LED112.A 46.37,14.48 v47.37,14.48 | S_LED102.A v47.37,9.41 | R1.1 63.49,35.05 61.09,35.05 58.21,37.93 58.21,47.88 55.75,50.33 47.68,50.33 S_LED177.C 46.37,49.02 v47.37,49.02 | S_LED182.A 68.59,49.02 v69.6,49.02 | S_LED187.C 69.58,44.97 v69.6,44.96
  Top 0.508: S_LED62.A S_LED57.C | S_LED72.A S_LED67.C | S_LED82.A S_LED77.C | S_LED52.A S_LED47.C | S_LED142.A S_LED137.C | S_LED132.A S_LED127.C | S_LED42.A S_LED37.C | S_LED32.A S_LED27.C | S_LED122.A S_LED117.C | S_LED112.A S_LED107.C | S_LED22.A S_LED17.C | S_LED12.A S_LED7.C | S_LED97.C S_LED102.A
  Bottom 0.152: v34.67,4.32 v34.67,9.4 v34.67,14.48 v34.67,19.56 v34.67,24.64 v34.67,29.72 v34.67,34.8 v34.67,39.88 v34.67,44.96 v34.67,49.02 | v47.37,49.02 v47.37,44.96 v47.37,39.88 v47.37,34.8 v47.37,29.72 v47.37,24.67 v47.37,19.59 v47.37,14.48 v47.37,9.41 v47.37,4.32 48.56,3.12 55.62,3.12 56.06,3.56 56.06,43.31 56.64,43.89 68.53,43.89 v69.6,44.96 v69.6,49.02
R2  (via drill 0.35)
  Top 0.152: S_LED88.C 36.21,49.02 v37.21,49.02 | S_LED178.C 48.91,49.02 49.02,49.02 | 49.02,49.02 v49.91,49.02 | 49.02,49.02 50.03,50.03 55.63,50.03 57.91,47.75 57.91,37.8 60.96,34.75 62.65,34.75 R2.1 | S_LED168.C S_LED173.A 48.91,44.96 v49.91,44.96 | S_LED158.C S_LED163.A 48.91,39.88 v49.91,39.88 | S_LED148.C S_LED153.A 48.91,34.8 v49.91,34.8 | S_LED83.A 36.21,44.96 v37.21,44.96 | S_LED73.A 36.21,39.88 v37.21,39.88 | S_LED63.A 36.21,34.8 v37.21,34.8 | S_LED53.A 37.2,29.73 v37.21,29.72 | S_LED43.A 36.21,24.64 v37.21,24.64 | S_LED33.A 36.21,19.56 v37.21,19.56 | S_LED23.A 36.21,14.48 v37.21,14.48 | S_LED13.A 36.21,9.4 v37.21,9.4 | S_LED3.A 37.2,4.33 v37.21,4.32 37.83,3.7 48.52,3.7 49.15,4.33 | S_LED143.A v49.9,29.73 v49.91,29.72 | S_LED133.A 48.91,24.64 v49.91,24.64 | S_LED123.A 48.91,19.56 v49.91,19.56 | S_LED113.A 48.91,14.48 v49.91,14.48 | S_LED103.A 48.91,9.4 v49.91,9.4 | S_LED93.A 49.15,4.33 | 49.15,4.33 v49.9,4.33 v49.91,4.32 | S_LED183.A 66.05,49.02 v67.06,49.02 | S_LED188.C 67.04,44.97 v67.06,44.96
  Top 0.508: S_LED83.A S_LED78.C | S_LED73.A S_LED68.C | S_LED63.A S_LED58.C | S_LED53.A S_LED48.C | S_LED143.A S_LED138.C | S_LED133.A S_LED128.C | S_LED43.A S_LED38.C | S_LED33.A S_LED28.C | S_LED123.A S_LED118.C | S_LED113.A S_LED108.C | S_LED23.A S_LED18.C | S_LED13.A S_LED8.C | S_LED103.A S_LED98.C
  Bottom 0.152: v37.21,49.02 v37.21,44.96 v37.21,39.88 v37.21,34.8 v37.21,29.72 v37.21,24.64 v37.21,19.56 v37.21,14.48 v37.21,9.4 v37.21,4.32 | v49.91,49.02 v49.91,44.96 v49.91,39.88 v49.91,34.8 v49.91,29.72 v49.91,24.64 v49.91,19.56 v49.91,14.48 v49.91,9.4 v49.91,4.32 50.8,3.43 55.5,3.43 55.75,3.68 55.75,43.43 56.52,44.2 66.29,44.2 v67.06,44.96 v67.06,49.02
R3  (via drill 0.35)
  Top 0.152: S_LED89.C 38.75,49.02 v39.75,49.02 | v52.45,49.02 v52.44,49.01 S_LED179.C 52.15,49.72 55.5,49.72 57.6,47.62 57.6,37.68 60.84,34.44 61.82,34.44 R3.1 | S_LED169.C S_LED174.A v52.44,44.97 v52.45,44.96 | S_LED159.C S_LED164.A 51.45,39.88 v52.45,39.88 | S_LED149.C S_LED154.A v52.45,34.81 | S_LED84.A 39.74,44.97 v39.75,44.96 | S_LED74.A v39.75,39.89 | S_LED64.A 38.75,34.8 v39.75,34.8 | S_LED54.A 38.75,29.72 v39.75,29.72 | S_LED44.A 39.74,24.65 v39.75,24.64 | S_LED34.A 38.75,19.56 v39.75,19.56 | S_LED24.A v39.75,14.49 | S_LED14.A v39.75,9.41 | S_LED4.A 39.74,4.33 v39.75,4.32 | S_LED144.A v52.44,29.73 v52.45,29.72 | S_LED134.A 51.45,24.64 v52.45,24.64 | S_LED124.A v52.44,19.57 v52.45,19.56 | S_LED114.A v52.45,14.49 | S_LED104.A 52.43,9.41 v52.45,9.43 | S_LED94.A v52.44,4.33 v52.45,4.32 | S_LED184.A 64.5,49.01 v64.52,49.02 | S_LED189.C 64.5,44.97 v64.52,44.96
  Top 0.508: S_LED84.A S_LED79.C | S_LED69.C S_LED74.A | S_LED64.A S_LED59.C | S_LED54.A S_LED49.C | S_LED44.A S_LED39.C | S_LED34.A S_LED29.C | S_LED19.C S_LED24.A | S_LED9.C S_LED14.A | S_LED104.A S_LED99.C | S_LED109.C S_LED114.A | S_LED124.A S_LED119.C | S_LED134.A S_LED129.C | S_LED144.A S_LED139.C
  Bottom 0.152: v39.75,4.32 v39.75,9.41 v39.75,14.49 v39.75,19.56 v39.75,24.64 v39.75,29.72 v39.75,34.8 v39.75,39.89 v39.75,44.96 v39.75,49.02 39.75,49.15 40.28,49.68 51.79,49.68 v52.45,49.02 | v52.45,49.02 v52.45,44.96 v52.45,39.88 v52.45,34.81 v52.45,29.72 v52.45,24.64 v52.45,19.56 v52.45,14.49 v52.45,9.43 v52.45,4.32 | v64.52,44.96 v64.52,49.02 62.83,49.02 62.23,49.63 61.73,49.63 61.12,49.02 55.85,49.02 55.24,49.63 53.06,49.63 v52.45,49.02
R4  (via drill 0.35)
  Top 0.152: v42.29,49.02 41.29,49.02 S_LED90.C 41.9,48.38 53.72,48.38 54.16,48.83 | v54.99,49.02 53.99,49.02 S_LED180.C 54.16,48.83 | S_LED170.C S_LED175.A 54.98,44.97 v54.99,44.96 | S_LED160.C S_LED165.A 54.98,39.89 v54.99,39.88 | S_LED150.C S_LED155.A 53.99,34.8 v54.99,34.8 | 54.16,48.83 57.3,45.69 57.3,37.55 60.95,33.9 R15.1 | S_LED85.A 41.29,44.96 v42.29,44.96 | S_LED75.A v42.28,39.89 v42.29,39.88 | S_LED65.A v42.28,34.81 v42.29,34.8 | S_LED55.A 41.29,29.72 v42.29,29.72 | S_LED45.A 41.29,24.64 v42.29,24.64 | S_LED35.A 41.29,19.56 v42.29,19.56 | S_LED25.A v42.28,14.49 v42.29,14.48 | S_LED15.A v42.29,9.41 | S_LED5.A v42.28,4.33 v42.29,4.32 | S_LED135.A 53.99,24.64 v54.99,24.64 | S_LED125.A 53.99,19.56 v54.99,19.56 | S_LED145.A 54.98,29.73 v54.99,29.72 | S_LED95.A 54.98,4.33 v54.99,4.32 | S_LED115.A 53.99,14.48 v54.99,14.48 | S_LED105.A v54.99,9.41 | S_LED185.A 60.97,49.02 v61.98,49.02 | S_LED190.C 61.96,44.97 v61.98,44.96
  Top 0.508: S_LED85.A S_LED80.C | S_LED75.A S_LED70.C | S_LED65.A S_LED60.C | S_LED55.A S_LED50.C | S_LED45.A S_LED40.C | S_LED35.A S_LED30.C | S_LED25.A S_LED20.C | S_LED10.C S_LED15.A | S_LED100.C S_LED105.A | S_LED115.A S_LED110.C | S_LED125.A S_LED120.C | S_LED135.A S_LED130.C | S_LED145.A S_LED140.C
  Bottom 0.152: v42.29,49.02 v42.29,44.96 v42.29,39.88 v42.29,34.8 v42.29,29.72 v42.29,24.64 v42.29,19.56 v42.29,14.48 v42.29,9.41 v42.29,4.32 | v54.99,49.02 v54.99,44.96 | v54.99,44.96 v54.99,39.88 v54.99,34.8 v54.99,29.72 v54.99,24.64 v54.99,19.56 v54.99,14.48 v54.99,9.41 v54.99,4.32 | v61.98,49.02 v61.98,44.96 v54.99,44.96
RESET  (via drill 0.35)
  Top 0.152: R9.1 64.39,20.45 63.9,20.94 U1.29 63.9,23.39 64.84,24.34 64.84,28.01 v64.9,28.07
  Bottom 0.152: v64.9,28.07 64.95,28.12 73.41,28.12 76.2,30.91 TC1.5
VCC  (via drill 0.35)
  Top 0.762: U$1.P$1 11.18,26.29 4.57,19.68 v4.57,19.3 | v78.87,46.35 v78.88,46.34 S1.2
  Bottom 0.762: v4.57,19.3 8.48,23.22 17.37,23.22 26.42,32.27 26.42,49.28 29.08,51.94 73.33,51.94 78.87,46.4 v78.87,46.35
VCC_IN  (via drill 0.35)
  Top 0.152: v66.17,24.89 66.67,24.38 66.67,23.44 67.05,23.07 67.05,18.17 66.91,18.03 65.02,18.03 R9.2 R14.2 R10.2
  Top 0.508: C1.2 69.47,26.54 69.2,26.27 U1.4 66.9,26.27 66.17,25.54 v66.17,24.89 | v60.83,26.8 60.46,27.17 60.46,28.31 60.1,28.67 U1.18
  Top 0.762: S1.3 78.9,43.34 v78.87,43.31
  Bottom 0.152: 73.73,36.38 73.99,36.38 74.13,36.23 77.56,36.23 78.74,35.05 TC1.2
  Bottom 0.508: v60.83,26.8 61.29,26.34 64.72,26.34 v66.17,24.89
  Bottom 0.762: v60.83,26.8 60.83,27.19 60.58,27.44 60.58,29.09 62.35,30.86 71.12,30.86 72.43,32.17 72.43,35.07 73.73,36.38 78.87,41.51 v78.87,43.31

## Text on the board
bPlace: Scott Porter | Co-Founder | Solder Creative